# Altium PCB Camera_LED_V1.1_20200515A.PcbDoc
Units mil, origin at the board's own origin, x right, y up, seen from the top; angles counter-clockwise.
Board outline 1043.31 x 2385.83 mil, 2 copper layers (Top Layer, Bottom Layer); 5 components, 27 nets, 102 pads, 150 vias.
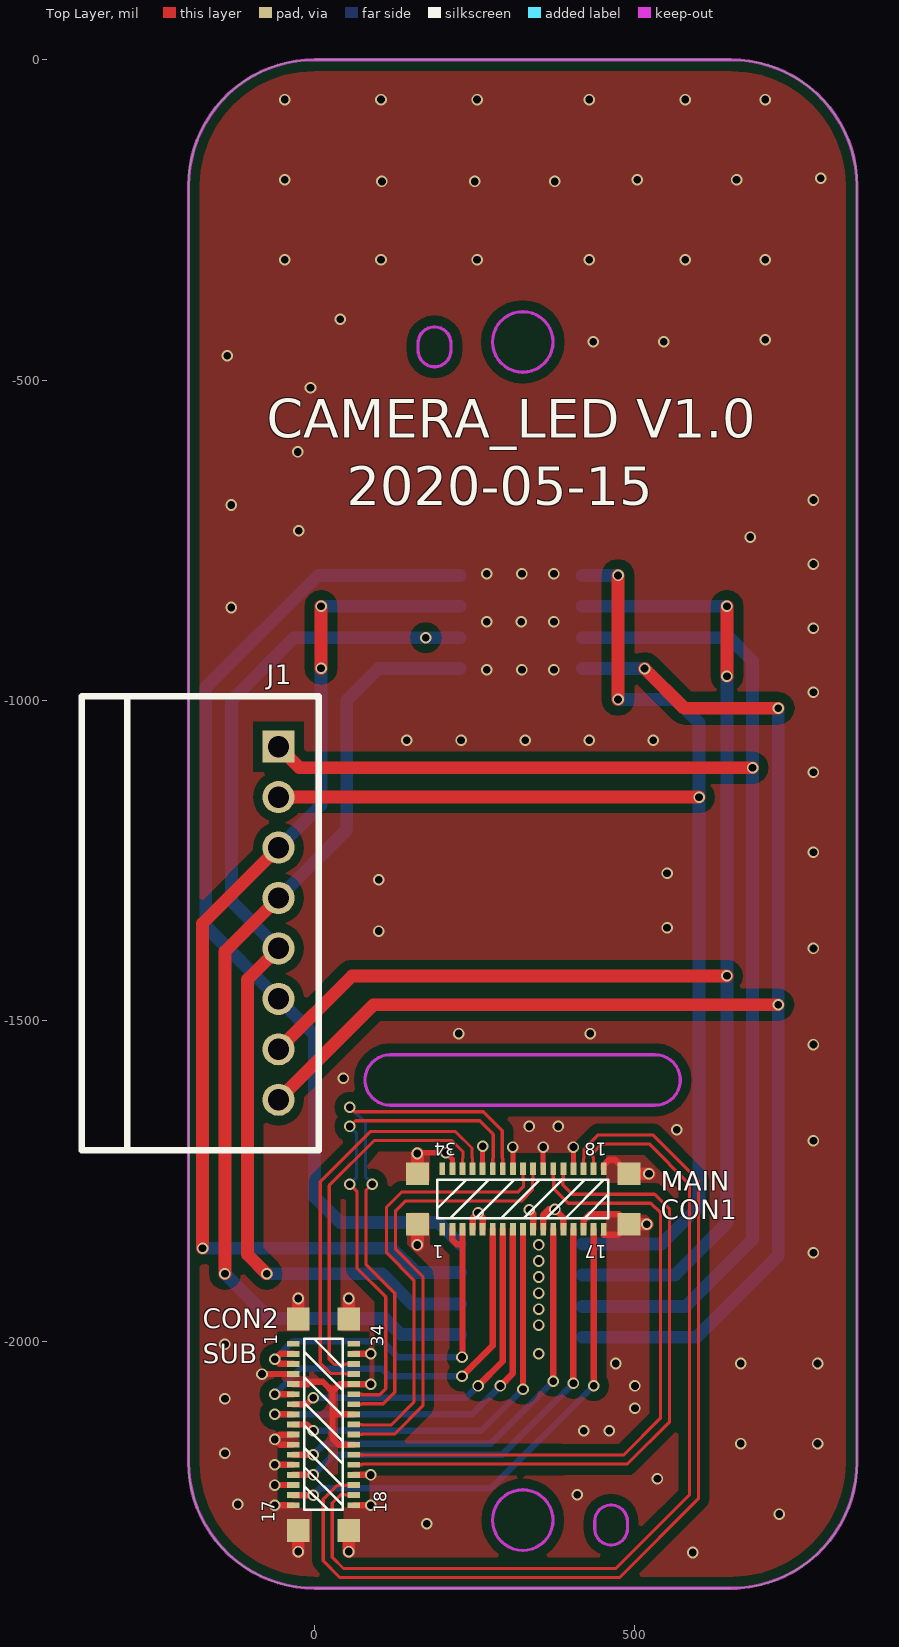
[diagram p0: Top Layer view]
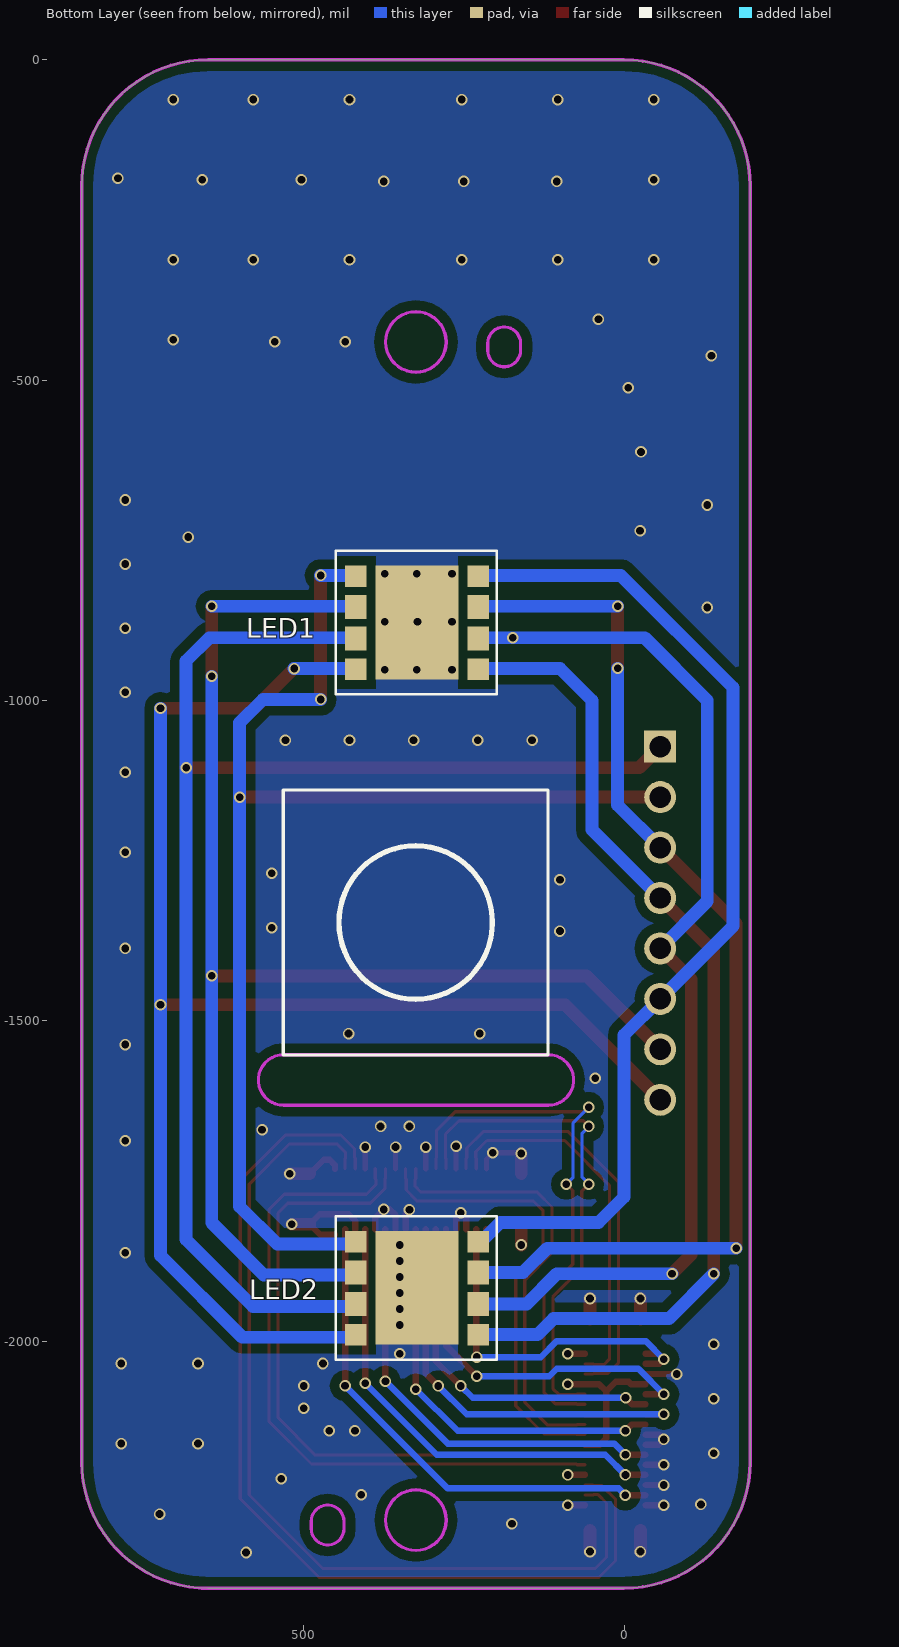
[diagram p1: Bottom Layer view, seen from below]

## Layer stack, top to bottom
Top Layer: signal copper 1.4
Dielectric: dielectric 12.6, FR-4, Dk 4.8
Bottom Layer: signal copper 1.4

## Board outline
-196.85,-2188.98 ccw(c0,-2188.98) 0,-2385.83 649.61,-2385.83 ccw(c649.61,-2188.98) 846.46,-2188.98 846.46,-196.85 ccw(c649.61,-196.85) 649.61,0 0,0 ccw(c0,-196.85) -196.85,-196.85

## Design rules (kind name [scope] priority, off if disabled: settings)
Clearance [All] p1: gap=5
ComponentClearance [All] p1: gap=0 collisioncheckmode=3 verticalgap=0 showdistances=FALSE
DiffPairsRouting DIFF100 [(InNetClass('DIFF'))] p1: maxlimit=9 minlimit=9 mostfreqgap=9 maxuncoupledlength=500
DiffPairsRouting [All] p2: maxlimit=9 minlimit=9 mostfreqgap=9 maxuncoupledlength=500
HoleSize [All] p1: absolutevalues=TRUE maxlimit=500 minlimit=1 maxpercent=80.000 minpercent=20.000
HoleToHoleClearance [All] p1: gap=0 allowstackedmicrovias=TRUE
MinimumSolderMaskSliver [All] p1: minsoldermaskwidth=0
PlaneConnect [All] p1: planeconnectstyle=Direct reliefexpansion=20 reliefentries=4 reliefconductorwidth=10 reliefairgap=10
PolygonConnect [All] p1: connectstyle=Direct reliefconductorwidth=10 reliefentries=4 polygonreliefangle="90 Angle"
RoutingVias [All] p1: holewidth=12 width=18 viastyle="Through Hole" minholewidth=10 minwidth=16 maxholewidth=28 maxwidth=50
SilkToSilkClearance [All] p1: silktosilkclearance=0
SilkscreenOverComponentPads [All] p1: minsilkscreentomaskgap=0
SolderMaskExpansion [All] p1: expansion=4
Width DIFF-100 [(InNetClass('DIFF'))] p1: maxlimit=5 minlimit=5 preferedwidth=5 minimp=50.000000 maximp=50.000000 favimp=50.000000
Width [All] p2: maxlimit=100 minlimit=5 preferedwidth=5 minimp=50.000000 maximp=50.000000 favimp=50.000000
20 further rules are at their usual default settings.

## Classes and differential pairs
net class DIFF: RCN RCP RDN0 RDN1 RDN2 RDN3 RDP0 RDP1 RDP2 RDP3
differential pair class DIFF100: RC RD0 RD1 RD2 RD3
differential pair RC: +RCP -RCN
differential pair RD3: +RDP3 -RDN3
differential pair RD2: +RDP2 -RDN2
differential pair RD1: +RDP1 -RDN1
differential pair RD0: +RDP0 -RDN0

## Components (designator, comment, footprint, x,y, rotation, side; value= is the part's Value field where it differs from the comment)
CON1 "34PIN BTB" BTB-34P 451.18,-1825.51 r180 top
CON2 "34PIN BTB" BTB-34P -33.5,-2256.18 r90 top
J1 "8*2.0,90" XH-8A-2.0-90 -56.46,-1072.2 r270 top
LED1 "LED-4C-8" SMD-8 418.83,-951.24 r90 bottom locked
LED2 "LED-4C-8" SMD-8 418.83,-1989.98 r90 bottom locked

## Footprints (in the part's own frame and the unit in brackets; to place one, negate y for a bottom-side part, rotate by r counter-clockwise, add the part's x,y. Pads: shape width x height; smd on the part's side, far side on the other; paste and mask are expansions set on the pad)
BTB-34P [mm]
  rect 0.23x0.5 smd: 1(6.4,0) 2(6,0) 3(5.6,0) 4(5.2,0) 5(4.8,0) 6(4.4,0) 7(4,0) 8(3.6,0) 9(3.2,0) 10(2.8,0) 11(2.4,0) 12(2,0) 13(1.6,0) 14(1.2,0) 15(0.8,0) 16(0.4,0) 17(0,0) 18(0,-2.4) 19(0.4,-2.4) 20(0.8,-2.4) 21(1.2,-2.4) 22(1.6,-2.4) 23(2,-2.4) 24(2.4,-2.4) 25(2.8,-2.4) 26(3.2,-2.4) 27(3.6,-2.4) 28(4,-2.4) 29(4.4,-2.4) 30(4.8,-2.4) 31(5.2,-2.4) 32(5.6,-2.4) 33(6,-2.4) 34(6.4,-2.4)
  rect 0.92x0.9 smd: G1(7.387,-0.2) G2(-1,-0.2) G3(-1,-2.2) G4(7.387,-2.2)
  silkscreen extent -0.18,-1.96 6.6,-0.43
SMD-8 [mm]
  rect 4.5x3.3 smd: 9(1.85,-2.425)
  rect 0.85x0.85 smd: P1(0,-4.85) P4(3.69,-4.85) P5(3.69,0) P8(0,0)
  rect 0.95x0.85 smd: P2(1.22,-4.85) P3(2.47,-4.85) P6(2.47,0) P7(1.22,0)
  silkscreen extent -1,-5.6 4.7,0.8
XH-8A-2.0-90 [mm]
  rect 1.27x1.27 hole 0.85: 1(0,0)
  round 1.27 hole 0.85: 2(2,0) 3(4,0) 4(6,0) 5(8,0) 6(10,0) 7(12,0) 8(14,0)
  silkscreen extent -2,-7.8 16,1.6

## Via types
v1: diameter 18, hole 12, Top Layer to Bottom Layer, tented both sides, 150 vias

## Nets (pads, with @x,y where several pads share a name; then routed paths per layer and width w, separated by ;. In a path a pad name is that pad's centre, name@x,y a point inside that pad or via, vN(x,y) a via of type N, cw(c..) or ccw(c..) an arc to the next point about the centre after c; other vN are vias at no path point)
CAM_PDN0: CON1.9 CON2.9 | length 639.1
  Top Layer w10: CON2.9 -12.2,-2130.2 v1(-2.2,-2140.2) ; v1(325.2,-2075) CON1.9
  Bottom Layer w10: v1(-2.2,-2140.2) 259.8,-2140.2 v1@325,-2075
CMMCLK0: CON1.16 CON2.16 | length 783.8
  Top Layer w10: CON2.16 v1(-2.08,-2240.43) ; v1(435.43,-2069.57) CON1.16
  Bottom Layer w10: v1(-2.08,-2240.43) 8.35,-2230 275,-2230 v1(435.43,-2069.57)
GND: CON1.4 CON1.5 CON1.10 CON1.11 CON1.13 CON1.15 CON1.17 CON1.18 CON1.21 CON1.24 CON1.27 CON1.30 CON1.33 CON1.G1 CON1.G2 CON1.G3 CON1.G4 CON2.4 CON2.5 CON2.10 CON2.11 CON2.13 CON2.15 CON2.17 CON2.18 CON2.21 CON2.24 CON2.27 CON2.30 CON2.33 CON2.G1 CON2.G2 CON2.G3 CON2.G4 LED1.9 LED2.9 | length 1389.6
  Top Layer w8: v1(160.36,-1707.2) 161.54,-1706.02 v1(204.96,-1706.02) 214.96,-1716.02 CON1.33 ; CON1.30 v1(262.21,-1696.02) ; CON1.27 v1(309.45,-1697.2) ; CON1.24 v1(356.69,-1697.2) ; CON1.21 v1(403.94,-1697.2)
  Top Layer w10: v1(-82.2,-2051.46) CON2.4 ; v1(-62.2,-2256.18) CON2.17 ; v1(-62.2,-2224.69) CON2.15 ; v1(-62.2,-2193.19) CON2.13 ; CON2.11 -54.05,-2161.69 v1(-62.2,-2153.54) -54.61,-2145.95 CON2.10 ; CON2.5 -10.87,-2067.21 -7.2,-2063.54 12.8,-2063.54 27.8,-2078.54 ; 27.8,-2114.45 CON2.27 ; CON2.18 v1(87.8,-2256.18) ; CON2.21 v1(87.8,-2208.94) ; CON2.24 37.8,-2161.69 27.8,-2151.69 27.8,-2078.54 ; CON2.33 v1(87.8,-2019.96) ; v1(87.8,-2067.21) CON2.30 39.13,-2067.21 27.8,-2078.54 ; CON1.4 246.46,-1808.48 v1(255,-1799.94) 262.21,-1807.14 CON1.5 ; v1(335,-1795) 340.95,-1800.95 CON1.10 ; CON1.11 356.69,-1803.31 365.47,-1794.53 v1(375.12,-1794.53) 388.19,-1807.6 CON1.13 ; CON1.15 419.69,-1812.32 429.8,-1802.2 475.12,-1802.2 CON1.G2 474.13,-1834.06 CON1.17@451.18,-1834.06 ; CON1.18 451.18,-1725.51 459.48,-1717.2 468.86,-1717.2 CON1.G3
  Top Layer w20: v1(-25.63,-2328.54) CON2.G2 ; CON2.G1 v1(-25.63,-1933.54) ; v1(53.11,-2328.54) CON2.G3 ; CON2.G4 v1(53.11,-1933.54) ; v1(160.36,-1850) CON1.G1 ; CON1.G4 v1(160.36,-1707.2) ; CON1.G2 v1(518.54,-1817.64) ; CON1.G3 v1(521.85,-1738.9)
  other v1: 590,-2330 175,-2285 725,-2270 -120,-2255 410,-2240 535,-2215 -140,-2175 665,-2160 785,-2160 420,-2140 460,-2140 500,-2105 -140,-2090 500,-2070 470,-2035 665,-2035 785,-2035 350,-2020 -140,-2005 350,-1975 350,-1950 350,-1925 350,-1900 350,-1875 778.54,-1862.2 350,-1850 778.54,-1687.2 565,-1670 335,-1665 380,-1665 45,-1590 778.54,-1537.2 225,-1520 430,-1520 778.54,-1387.2 100,-1360 550,-1355 100,-1280 550,-1270 778.54,-1237.2 778.54,-1112.2 143.54,-1062.2 228.54,-1062.2 328.54,-1062.2 428.54,-1062.2 528.54,-1062.2 778.54,-987.2 268.54,-952.2 323.54,-952.2 373.54,-952.2 778.54,-887.2 268.54,-877.2 322.36,-877.4 373.54,-877.2 -130,-855 268.54,-802.2 323.54,-802.2 373.54,-802.2 778.54,-787.2 680,-745 -25,-735 -130,-695 778.54,-687.2 -26.46,-612.2 -6.46,-512.2 -136.46,-462.2 435,-440 545,-440 703.54,-437.2 40,-405 -46.46,-312.2 103.54,-312.2 253.54,-312.2 428.54,-312.2 578.54,-312.2 703.54,-312.2 105,-190 250,-190 375,-190 -46.46,-187.2 503.54,-187.2 658.54,-187.2 790,-185 -46.46,-62.2 103.54,-62.2 253.54,-62.2 428.54,-62.2 578.54,-62.2 703.54,-62.2
LED1+: J1.8 LED1.P8 LED2.P8 | length 2385.6
  Top Layer w20: J1.8 91.93,-1475 v1(723.54,-1475) ; v1(515,-950.24) 576.97,-1012.2 v1(723.54,-1012.2)
  Bottom Layer w20: LED2.P8@417.83,-1993.98 596.02,-1993.98 723.54,-1866.46 v1(723.54,-1475) v1(723.54,-1012.2) ; LED1.P8@417.83,-950.24 v1(515,-950.24)
LED1-: J1.4 LED1.P1 LED2.P1 | length 1578.4
  Top Layer w20: v1(-140,-1895) -140,-1391.97 J1.4
  Bottom Layer w20: v1(-140,-1895) -70,-1965 110,-1965 134.98,-1989.98 LED2.P1 ; J1.4 50,-1201.97 50,-1000 99.76,-950.24 LED1.P1@226.89,-950.24
LED2+: J1.7 LED1.P6 LED2.P6 | length 2195
  Top Layer w20: J1.7 58.19,-1430 v1(643.54,-1430) ; v1(643.54,-962.2) v1(643.54,-852.99)
  Bottom Layer w20: LED2.P6@417.83,-1896.73 562.27,-1896.73 643.54,-1815.46 v1(643.54,-1430) v1(643.54,-962.2) ; LED1.P6@417.83,-852.99 v1(643.54,-852.99)
LED2-: J1.3 LED1.P3 LED2.P3 | length 1714
  Top Layer w20: v1(-175,-1855) -175,-1348.23 J1.3 ; v1(10,-950) v1(10,-852.99)
  Bottom Layer w20: v1(-175,-1855) 120,-1855 157.73,-1892.73 LED2.P3 ; J1.3 10,-1163.23 v1(10,-950) ; v1(10,-852.99) LED1.P3@226.89,-852.99
LED3+: J1.6 LED1.P4 LED2.P4 | length 1592.2
  Bottom Layer w20: LED2.P4@226.89,-1848.7 193.19,-1815 40,-1815 0,-1775 0,-1522.36 J1.6 -170,-1352.36 -170,-980 5.04,-804.96 173.54,-804.96 LED1.P4@226.89,-804.96
LED3-: J1.2 LED1.P5 LED2.P5 | length 2008.8
  Top Layer w20: J1.2 v1(600,-1150.94) ; v1(473.54,-998.54) v1(473.54,-804.96)
  Bottom Layer w20: LED2.P5@417.83,-1848.7 541.3,-1848.7 600,-1790 600,-1035 563.54,-998.54 v1(473.54,-998.54) ; LED1.P5@417.83,-804.96 v1(473.54,-804.96)
LED4+: J1.5 LED1.P2 LED2.P2 | length 1677.7
  Top Layer w20: v1(-75,-1895) -105,-1865 -105,-1435.71 J1.5
  Bottom Layer w20: v1(-75,-1895) 105,-1895 151.94,-1941.94 LED2.P2 ; J1.5 -130,-1313.62 -130,-1000 -32.2,-902.2 v1(173.54,-902.2) LED1.P2@226.89,-902.2
LED4-: J1.1 LED1.P7 LED2.P7 | length 2246.2
  Top Layer w20: J1.1 -23.66,-1105 v1(683.54,-1105)
  Bottom Layer w20: LED2.P7@417.83,-1945.94 579.06,-1945.94 683.54,-1841.46 683.54,-938.54 647.2,-902.2 LED1.P7@417.83,-902.2
RCN: CON1.29 CON2.29 | length 785.6
  Top Layer w5: v1(55,-1755) 66,-1766 66,-1886 111,-1931 111,-2074.2 101.37,-2083.83 74.36,-2083.83 73.48,-2082.95 CON2.29 ; v1(55,-1665) 63.8,-1656.2 257.54,-1656.2 278.83,-1677.49 278.83,-1714.03 277.95,-1714.91 CON1.29
  Bottom Layer w5: v1(55,-1755) 65.5,-1744.5 65.5,-1675.5 v1(55,-1665)
RCP: CON1.28 CON2.28 | length 866.8
  Top Layer w5: v1(55,-1635) 62.2,-1642.2 263.34,-1642.2 292.83,-1671.69 292.83,-1714.03 293.7,-1714.91 CON1.28 ; CON2.28 73.48,-2098.7 74.36,-2097.83 107.17,-2097.83 125,-2080 125,-1925.2 80,-1880.2 80,-1765 v1(90,-1755)
  Bottom Layer w5: v1(55,-1635) 79.5,-1659.5 79.5,-1744.5 v1(90,-1755)
RDN0: CON1.26 CON2.26 | length 686.2
  Top Layer w5: CON2.26 73.48,-2130.2 74.36,-2131.07 119.13,-2131.07 155,-2095.2 155,-1905 112.38,-1862.38 112.38,-1790.72 135.58,-1767.52 316.98,-1767.52 326.07,-1758.42 326.07,-1747.28 325.2,-1746.4 CON1.26
RDN1: CON1.32 CON2.32 | length 585.4
  Top Layer w5: CON2.32 48.48,-2035.71 47.61,-2036.58 30.84,-2036.58 22.8,-2028.54 22.8,-1757 92.83,-1686.97 214.1,-1686.97 231.58,-1704.45 231.58,-1714.03 230.71,-1714.91 CON1.32
RDN2: CON1.23 CON2.23 | length 1038.2
  Top Layer w5: CON2.23 73.48,-2177.44 ; 74.36,-2178.32 73.48,-2177.44 ; CON1.23 372.44,-1746.52 373.32,-1747.39 373.32,-1761.98 396.14,-1784.81 524.81,-1784.81 540,-1800 540,-2120 482.06,-2177.94 73.98,-2177.94 73.48,-2177.44
RDN3: CON1.20 CON2.20 | length 1545.3
  Top Layer w5: CON2.20 48.48,-2224.69 47.61,-2225.56 34.75,-2225.56 13.32,-2246.99 13.32,-2343.12 39.2,-2369 476,-2369 599,-2246 599,-1749.2 528,-1678.2 442.54,-1678.2 420.56,-1700.19 420.56,-1714.03 419.69,-1714.91 CON1.20
RDP0: CON1.25 CON2.25 | length 709.4
  Top Layer w5: CON2.25 73.48,-2145.95 74.36,-2145.07 124.93,-2145.07 169,-2101 169,-1899.2 126.38,-1856.58 126.38,-1796.52 141.38,-1781.52 322.78,-1781.52 340.07,-1764.22 340.07,-1747.28 340.95,-1746.4 CON1.25
RDP1: CON1.31 CON2.31 | length 655
  Top Layer w5: CON2.31 48.48,-2051.46 47.61,-2050.58 25.04,-2050.58 8.8,-2034.34 8.8,-1751.2 87.03,-1672.97 219.9,-1672.97 245.58,-1698.65 245.58,-1714.03 246.46,-1714.91 CON1.31
RDP2: CON1.22 CON2.22 | length 1061.1
  Top Layer w5: CON2.22 73.48,-2193.19 74.24,-2192.44 ; 74.36,-2192.32 73.98,-2191.94 487.86,-2191.94 554,-2125.8 554,-1794.2 530.6,-1770.81 401.94,-1770.81 387.32,-1756.18 387.32,-1747.39 388.19,-1746.52 CON1.22
RDP3: CON1.19 CON2.19 | length 1429.3
  Top Layer w5: CON2.19 48.48,-2240.43 47.61,-2239.56 40.55,-2239.56 27.32,-2252.79 27.32,-2337.32 45,-2355 470.2,-2355 585,-2240.2 585,-1755 522.2,-1692.2 448.34,-1692.2 434.56,-1705.99 434.56,-1714.03 435.43,-1714.91 CON1.19
SCL2: CON1.8 CON2.8 | length 651.9
  Top Layer w10: v1(-62.2,-2114.45) CON2.8 ; v1(290,-2070) 309.45,-2050.55 CON1.8
  Bottom Layer w10: v1(-62.2,-2114.45) 245.55,-2114.45 v1(290,-2070)
SDA2: CON1.7 CON2.7 | length 560.9
  Top Layer w10: CON2.7 -12.36,-2098.7 v1(-2.36,-2088.7) ; v1(255,-2070) 293.7,-2031.3 CON1.7
  Bottom Layer w10: v1(-2.36,-2088.7) 236.3,-2088.7 v1(255,-2070)
VCAM_AF_PMU: CON1.2 CON1.3 CON2.2 CON2.3 | length 603.1
  Top Layer w10: v1(-62.2,-2028.54) -53.62,-2019.96 CON2.2 ; -55.04,-2035.71 CON2.3 ; CON1.2 214.96,-1841.77 221.89,-1848.7 227.01,-1848.7 228.31,-1850 230.71,-1850 ; v1@230.71,-2025 230.71,-1850 ; CON1.3 230.71,-1850
  Bottom Layer w10: v1(-62.2,-2028.54) -33.66,-2000 105,-2000 130,-2025 v1(230,-2025)
VCAM_IO_PMU: CON1.6 CON2.6 | length 591.6
  Top Layer w10: v1(-62.2,-2082.95) CON2.6 ; v1(230,-2055) 277.95,-2007.05 CON1.6
  Bottom Layer w10: v1(-62.2,-2082.95) -22.47,-2043.21 105,-2043.21 116.79,-2055 v1(230,-2055)
VCAMA_PMU: CON1.12 CON2.12 | length 690.6
  Top Layer w10: CON2.12 v1(-2.2,-2177.44) ; v1(372.44,-2062.56) CON1.12
  Bottom Layer w10: v1(-2.2,-2177.44) 15.24,-2160 275,-2160 v1(372.44,-2062.56)
VCAMD_PMU: CON1.14 CON2.14 | length 737.2
  Top Layer w10: CON2.14 v1(-2.2,-2208.94) ; v1(403.94,-2066.06) CON1.14
  Bottom Layer w10: v1(-2.2,-2208.94) 29.29,-2177.44 292.56,-2177.44 v1(403.94,-2066.06)
pads on no net: CON1.1 CON1.34 CON2.1 CON2.34

## Polygon pours and split planes (outlines as drawn)
GND on Top Layer "Top Layer-No Net" (solid, remove dead copper, pour order 1000): -240,-2215 -240,-1135 -240,-65 -145,30 -115,60 300,60 775,60 890,-55 905,-70 905,-845 905,-2315 850,-2370 755,-2465 425,-2465 -95,-2465 -220,-2340 -240,-2320 -240,-2235
GND on Bottom Layer "Top Layer-No Net" (solid, remove dead copper, pour order 1001): -240,-880 -240,-50 -155,35 -130,60 160,60 755,60 860,-45 925,-110 925,-405 925,-2315 845,-2395 800,-2440 310,-2440 -155,-2440 -240,-2355 -240,-880

## Keep-outs
Keep-Out Layer:
  circle w5: c324.87,-440.5 r47.24
  circle w5: c324.87,-2279.46 r47.24
  lines w5: 649.61,-2385.83 ccw(c649.61,-2188.98) 846.46,-2188.98 846.46,-196.85 ; 659.17,-2385.83 0,-2385.83 cw(c0,-2188.98) -196.85,-2188.98 -196.85,-196.85 cw(c0,-196.85) 0,0 649.61,0 cw(c649.61,-196.85) 846.46,-196.85 ; 846.46,-196.85 846.46,-196.85 ; 118.05,-1631.85 cw(c118.05,-1592.48) 118.05,-1553.11 531.43,-1553.11 cw(c531.43,-1592.48) 531.43,-1631.85 118.05,-1631.85 ; 161.48,-453.69 ccw(c187.07,-453.69) 212.66,-453.69 212.66,-442.58 ccw(c187.07,-442.58) 161.48,-442.58 161.48,-453.69 ; 437.07,-2292.65 ccw(c462.66,-2292.65) 488.25,-2292.65 488.25,-2281.54 ccw(c462.66,-2281.54) 437.07,-2281.54 437.07,-2292.65

## Silkscreen, mask and mechanical layers (free items; w line width, h text height)
Top Overlay:
  text "CAMERA_LED V1.0" at -75,-590 h60
  text "2020-05-15" at 50,-695 h60
  text "MAIN" at 540,-1765 h30
  text "SUB" at -175,-2035 h30
Bottom Overlay:
  circle w5: c325.2,-1346.69 r121.41
  circle w5: c325.2,-1346.69 r118.11
  lines w5: 118.5,-1553.39 531.89,-1553.39 531.89,-1140 118.5,-1140 118.5,-1553.39
Mechanical 1:
  circle w5: c324.87,-440.5 r47.24
  circle w5: c324.87,-2279.46 r47.24
  lines w5: -196.85,-1703.33 -292.68,-1703.33 -292.68,-994.67 -196.85,-994.67 ; -196.85,-2188.98 ccw(c0,-2188.98) 0,-2385.83 649.61,-2385.83 ccw(c649.61,-2188.98) 846.46,-2188.98 846.46,-196.85 ccw(c649.61,-196.85) 649.61,0 0,0 ccw(c0,-196.85) -196.85,-196.85 -196.85,-2188.98 ; 118.05,-1631.85 cw(c118.05,-1592.48) 118.05,-1553.11 531.43,-1553.11 cw(c531.43,-1592.48) 531.43,-1631.85 118.05,-1631.85 ; 161.48,-453.69 ccw(c187.07,-453.69) 212.66,-453.69 212.66,-442.58 ccw(c187.07,-442.58) 161.48,-442.58 161.48,-453.69 ; 437.07,-2292.65 ccw(c462.66,-2292.65) 488.25,-2292.65 488.25,-2281.54 ccw(c462.66,-2281.54) 437.07,-2281.54 437.07,-2292.65
Mechanical 6:
  lines w5: -196.85,-1703.33 -196.85,-2188.98 ccw(c0,-2188.98) 0,-2385.83 649.61,-2385.83 ccw(c649.61,-2188.98) 846.46,-2188.98 846.46,-196.85 ccw(c649.61,-196.85) 649.61,0 0,0 ccw(c0,-196.85) -196.85,-196.85 -196.85,-994.67 ; 118.05,-1553.11 118.05,-1139.73 531.43,-1139.73 531.43,-1553.11 ; -295.28,-1703.33 6.14,-1703.33 6.14,-994.67 -295.28,-994.67 -295.28,-1703.33 ; 149.67,-1784.81 149.67,-1650.36 500.06,-1650.36 500.06,-1784.81 149.67,-1784.81 ; 167.39,-1756.66 167.39,-1678.51 482.35,-1678.51 482.35,-1756.66 167.39,-1756.66 ; 198.76,-2027.14 450.73,-2027.14 450.73,-1807.81 198.76,-1807.81 198.76,-2027.14 ; 198.76,-987.73 450.73,-987.73 450.73,-768.4 198.76,-768.4 198.76,-987.73
Mechanical 9:
  circle w2.5: c0,0 r1.25
  circle w2.5: c-196.85,-196.85 r1.25
  circle w2.5: c846.46,-196.85 r1.25

## Dimensions
0,-2385.83 to 0,0 on Mechanical 1
-196.46,-3.11 to 846.85,-3.11 on Mechanical 1

## Text inside footprints (layer, text, board x,y; h text height)
CON1: Top Overlay "34" at 221.18,-1690.51 h20 r180; Top Overlay "18" at 456.18,-1690.51 h20 r180; Top Overlay "17" at 456.18,-1850.51 h20 r180; Top Overlay "1" at 201.18,-1850.51 h20 r180
CON2: Top Overlay "34" at 107.8,-2008.54 h20 r90; Top Overlay "18" at 112.8,-2268.54 h20 r90; Top Overlay "17" at -62.2,-2283.54 h20 r90; Top Overlay "1" at -58.5,-2006.18 h20 r90